# EAGLE board CT_schematic (EAGLE 7.6.0)

Size 100 x 80 mm. Coordinates in mm from the lower left corner, seen from the top.
Outline: 0,0 100,0 100,80 0,80 0,0
Copper layers (1*16): Top 0.035mm / dielectric 1.5mm / Bottom 0.035mm
Design rules "default": minimum track width 10mil, minimum drill 24mil, track to track 8mil, track to pad 8mil, pad to pad 8mil, via to via 8mil, smd to smd 8mil, copper to edge 40mil, drill to drill 8mil, minimum pad ring 10mil, minimum via ring 8mil, stop-mask expansion 4mil, vias tented up to drill 0mil, thermal gap 10mil

## Footprints (pad centres in the part's own frame; a part is rotated, then mirrored left to right if it is on the bottom)
C0603 = smd 0.8 x 0.8: 1 -0.762,0; 2 0.762,0
C0402 = smd 0.5 x 0.5: 1 -0.508,0; 2 0.508,0
C1210 = smd 1.2 x 2.5: 1 -1.524,0; 2 1.524,0
C0805 = smd 1.2 x 1.3: 1 -1.016,0; 2 1.016,0
C1206 = smd 1.3 x 1.6: 1 -1.524,0; 2 1.524,0
L0603 = smd 0.8 x 0.8: 1 -0.762,0; 2 0.762,0
DR1040 = smd 1.6 x 3.2: 1 -4.458,0; 2 4.458,0
R0603 = smd 0.8 x 0.8: 1 -0.762,0; 2 0.762,0
LQFP64 = smd 0.3 x 1.2: 1 -3.75,-5.75; 2 -3.25,-5.75; 3 -2.75,-5.75; 4 -2.25,-5.75; 5 -1.75,-5.75; 6 -1.25,-5.75; 7 -0.75,-5.75; 8 -0.25,-5.75; 9 0.25,-5.75; 10 0.75,-5.75; 11 1.25,-5.75; 12 1.75,-5.75; 13 2.25,-5.75; 14 2.75,-5.75; 15 3.25,-5.75; 16 3.75,-5.75; 33 3.75,5.75; 34 3.25,5.75; 35 2.75,5.75; 36 2.25,5.75; 37 1.75,5.75; 38 1.25,5.75; 39 0.75,5.75; 40 0.25,5.75; 41 -0.25,5.75; 42 -0.75,5.75; 43 -1.25,5.75; 44 -1.75,5.75; 45 -2.25,5.75; 46 -2.75,5.75; 47 -3.25,5.75; 48 -3.75,5.75 | smd 1.2 x 0.3: 17 5.75,-3.75; 18 5.75,-3.25; 19 5.75,-2.75; 20 5.75,-2.25; 21 5.75,-1.75; 22 5.75,-1.25; 23 5.75,-0.75; 24 5.75,-0.25; 25 5.75,0.25; 26 5.75,0.75; 27 5.75,1.25; 28 5.75,1.75; 29 5.75,2.25; 30 5.75,2.75; 31 5.75,3.25; 32 5.75,3.75; 49 -5.75,3.75; 50 -5.75,3.25; 51 -5.75,2.75; 52 -5.75,2.25; 53 -5.75,1.75; 54 -5.75,1.25; 55 -5.75,0.75; 56 -5.75,0.25; 57 -5.75,-0.25; 58 -5.75,-0.75; 59 -5.75,-1.25; 60 -5.75,-1.75; 61 -5.75,-2.25; 62 -5.75,-2.75; 63 -5.75,-3.25; 64 -5.75,-3.75
SOIC-8 = smd 1.6 x 0.6: 1 -2.7,1.905 | smd 1.55 x 0.6: 2 -2.7,0.635; 3 -2.7,-0.635; 4 -2.7,-1.905; 5 2.7,-1.905; 6 2.7,-0.635; 7 2.7,0.635; 8 2.7,1.905
TST-110-05-T-D-RA = drill 1 pad 1.7 square: 1 0,0 | drill 1 pad 1.7: 2 0,2.54; 3 2.54,0; 4 2.54,2.54; 5 5.08,0; 6 5.08,2.54; 7 7.62,0; 8 7.62,2.54; 9 10.16,0; 10 10.16,2.54; 11 12.7,0; 12 12.7,2.54; 13 15.24,0; 14 15.24,2.54; 15 17.78,0; 16 17.78,2.54; 17 20.32,0; 18 20.32,2.54; 19 22.86,0; 20 22.86,2.54
AT24C02D = smd 1.6 x 0.6: 1 -2.475,1.905 | smd 1.55 x 0.6: 2 -2.475,0.635; 3 -2.475,-0.635; 4 -2.475,-1.905; 5 2.475,-1.905; 6 2.475,-0.635; 7 2.475,0.635; 8 2.475,1.905
DFN-6 = smd 0.805 x 0.3: 1 -0.952,0.5; 2 -0.952,0; 3 -0.952,-0.5; 4 0.952,-0.5; 5 0.952,0; 6 0.952,0.5 | smd 0.61 x 1.42: 7 0,0
FCI_10118193-0001LF = smd 0.4 x 1.35: 1 -1.3,2.675; 2 -0.65,2.675; 3 0,2.675; 4 0.65,2.675; 5 1.3,2.675 | smd 1.6 x 1.4: 6 -3.2,2.45; 7 3.2,2.45 | smd 1.9 x 1.9: 8 -1.2,0; 9 1.2,0 | hole 0.5: -3.3,0; 3.3,0
SOT143B = smd 1 x 0.7: 1 -0.75,-1 | smd 0.6 x 0.7: 2 0.95,-1; 3 0.95,1; 4 -0.95,1
QFN-28 = smd 0.813 x 0.305: 1 -2.451,1.5; 2 -2.451,1; 3 -2.451,0.5; 4 -2.451,0; 5 -2.451,-0.5; 6 -2.451,-1; 7 -2.451,-1.5; 15 2.451,-1.5; 16 2.451,-1; 17 2.451,-0.5; 18 2.451,0; 19 2.451,0.5; 20 2.451,1; 21 2.451,1.5 | smd 0.305 x 0.813: 8 -1.5,-2.451; 9 -1,-2.451; 10 -0.5,-2.451; 11 0,-2.451; 12 0.5,-2.451; 13 1,-2.451; 14 1.5,-2.451; 22 1.5,2.451; 23 1,2.451; 24 0.5,2.451; 25 0,2.451; 26 -0.5,2.451; 27 -1,2.451; 28 -1.5,2.451 | smd 3.607 x 3.607: 29 0,0
SJ-43515TS-SMT-TR = smd 2.2 x 3: 1 0.6,-7.4; 4 3.4,-7.4 | smd 3 x 3: 2 12.8,-7.4; 5 17,-3 | smd 2 x 3: 3 5.3,0; 6 2.5,0 | drill 1.8: P$7 4.5,-3.69; P$8 11.54,-3.69
ABLS-25.000MHZ-B2F-T = smd 5.6 x 2.8: 1 -3.81,0; 2 5.69,0
ASEK = smd 1.4 x 1: 1 -1.1,-0.8; 2 1.1,-0.8; 3 1.1,0.8; 4 -1.1,0.8
ASFL1 = smd 1.7 x 1.5: 1 -1.27,-1.1; 2 1.27,-1.1; 3 1.27,1.1; 4 -1.27,1.1
TSOT-23-5 = smd 1.3 x 0.62: 1 -1.31,0.95; 2 -1.31,0; 3 -1.31,-0.95; 4 1.31,-0.95; 5 1.31,0.95
DFN8_2X3MC = smd 0.813 x 0.305: 1 -1.398,0.75; 2 -1.398,0.25; 3 -1.398,-0.25; 4 -1.398,-0.75; 5 1.398,-0.75; 6 1.398,-0.25; 7 1.398,0.25; 8 1.398,0.75 | smd 1.753 x 1.549: 9 0,0
JST-2-SMD = smd 1 x 4.6: 1 -1,-3.7; 2 1,-3.7 | smd 1.6 x 3.4: NC1 -3.4,1.5; NC2 3.4,1.5
SON-6 = smd 0.55 x 0.3: 1 -0.355,0.5 | smd 0.52 x 0.3: 2 -0.37,0; 3 -0.37,-0.5; 4 0.37,-0.5; 5 0.37,0; 6 0.37,0.5
SW_4-1437565-2 = smd 1.4 x 2.1: 1 -2.23,4.55; 2 -2.23,-4.55; 3 2.23,4.55; 4 2.23,-4.55
LGM67K-G1J2-24-Z = smd 0.8 x 1.4: A -2,0; C 0,0
NC7SZ125M5X = smd 1.3 x 0.7: 1 -1.3,0.95; 2 -1.3,0; 3 -1.3,-0.95; 4 1.3,-0.95; 5 1.3,0.95

## Placement (x,y rotation side)
C1  1e-06  [C0603]  -41.91,67.31 0 top  (outside the outline)
C2  1e-07  [C0603]  -45.72,67.31 0 top  (outside the outline)
C3  1e-07  [C0603]  -49.53,67.31 0 top  (outside the outline)
C4  1e-07  [C0603]  -53.34,67.31 0 top  (outside the outline)
C5  1e-07  [C0603]  -57.15,67.31 0 top  (outside the outline)
C6  1e-07  [C0603]  -60.96,67.31 0 top  (outside the outline)
C7  4.7e-06  [C0603]  -34.29,67.31 0 top  (outside the outline)
C8  2.2e-06  [C0603]  -38.1,67.31 0 top  (outside the outline)
C9  1e-08  [C0603]  -64.77,67.31 0 top  (outside the outline)
C10  1e-06  [C0603]  -68.58,67.31 0 top  (outside the outline)
C11  1e-11  [C0402]  -49.53,72.39 0 top  (outside the outline)
C12  1e-11  [C0402]  -53.34,72.39 0 top  (outside the outline)
C13  1e-06  [C0603]  -72.39,67.31 0 top  (outside the outline)
C14  1e-08  [C0402]  -57.15,72.39 0 top  (outside the outline)
C15  1e-07  [C0402]  -60.96,72.39 0 top  (outside the outline)
C16  1e-08  [C0402]  -64.77,72.39 0 top  (outside the outline)
C17  1e-07  [C0402]  -68.58,72.39 0 top  (outside the outline)
C18  2.2e-05  [C1210]  -58.42,49.53 0 top  (outside the outline)
C19  2.2e-05  [C1210]  -64.77,49.53 0 top  (outside the outline)
C20  1e-09  [C0402]  -72.39,72.39 0 top  (outside the outline)
C21  1e-09  [C0402]  -76.2,72.39 0 top  (outside the outline)
C22  1e-07  [C0402]  -15.24,77.47 0 top  (outside the outline)
C23  1e-07  [C0402]  -19.05,77.47 0 top  (outside the outline)
C24  1e-07  [C0402]  -22.86,77.47 0 top  (outside the outline)
C25  1e-07  [C0402]  -26.67,77.47 0 top  (outside the outline)
C26  1e-07  [C0402]  -30.48,77.47 0 top  (outside the outline)
C27  1e-05  [C0805]  -27.94,55.88 0 top  (outside the outline)
C28  1e-05  [C0805]  -33.02,55.88 0 top  (outside the outline)
C29  1e-05  [C0805]  -38.1,55.88 0 top  (outside the outline)
C30  1e-05  [C0805]  -43.18,55.88 0 top  (outside the outline)
C31  1e-05  [C0805]  -48.26,55.88 0 top  (outside the outline)
C32  1e-08  [C0402]  -34.29,77.47 0 top  (outside the outline)
C33  1e-08  [C0402]  -38.1,77.47 0 top  (outside the outline)
C34  1e-05  [C0805]  -53.34,55.88 0 top  (outside the outline)
C35  1e-05  [C0805]  -58.42,55.88 0 top  (outside the outline)
C36  1e-07  [C0402]  -41.91,77.47 0 top  (outside the outline)
C37  1e-05  [C1206]  -71.12,48.26 0 top  (outside the outline)
C38  1e-05  [C1206]  -77.47,48.26 0 top  (outside the outline)
C39  1e-08  [C0402]  -45.72,77.47 0 top  (outside the outline)
C40  1e-08  [C0402]  -49.53,77.47 0 top  (outside the outline)
F1  240.0  [L0603]  -76.2,67.31 0 top  (outside the outline)
I1  5.2e-06  [DR1040]  -55.88,20.32 0 top  (outside the outline)
R2  1000.0  [R0603]  -15.24,72.39 0 top  (outside the outline)
R4  4700.0  [R0603]  -19.05,72.39 0 top  (outside the outline)
R5  2200.0  [R0603]  -22.86,72.39 0 top  (outside the outline)
R6  2200.0  [R0603]  -26.67,72.39 0 top  (outside the outline)
R7  2200.0  [R0603]  -30.48,72.39 0 top  (outside the outline)
R8  2200.0  [R0603]  -34.29,72.39 0 top  (outside the outline)
R9  10000.0  [R0603]  -25.4,62.23 0 top  (outside the outline)
R10  10000.0  [R0603]  -30.48,62.23 0 top  (outside the outline)
R11  10000.0  [R0603]  -35.56,62.23 0 top  (outside the outline)
R12  10000.0  [R0603]  -40.64,62.23 0 top  (outside the outline)
R13  10000.0  [R0603]  -45.72,62.23 0 top  (outside the outline)
R14  10000.0  [R0603]  -50.8,62.23 0 top  (outside the outline)
R15  10000.0  [R0603]  -55.88,62.23 0 top  (outside the outline)
R16  10000.0  [R0603]  -60.96,62.23 0 top  (outside the outline)
R17  10000.0  [R0603]  -66.04,62.23 0 top  (outside the outline)
R18  47000.0  [R0603]  -71.12,62.23 0 top  (outside the outline)
R19  47000.0  [R0603]  -76.2,62.23 0 top  (outside the outline)
R20  47000.0  [R0603]  -15.24,67.31 0 top  (outside the outline)
R21  680.0  [R0603]  -38.1,72.39 0 top  (outside the outline)
R22  220000.0  [R0603]  -76.2,55.88 0 top  (outside the outline)
R23  1000000.0  [R0603]  -71.12,55.88 0 top  (outside the outline)
R24  10000.0  [R0603]  -20.32,67.31 0 top  (outside the outline)
R25  10000.0  [R0603]  -25.4,67.31 0 top  (outside the outline)
R26  9100.0  [R0603]  -41.91,72.39 0 top  (outside the outline)
R27  680000.0  [R0603]  -15.24,62.23 0 top  (outside the outline)
R28  120000.0  [R0603]  -20.32,62.23 0 top  (outside the outline)
R29  2000.0  [R0603]  -45.72,72.39 0 top  (outside the outline)
R30  10000.0  [R0603]  -30.48,67.31 0 top  (outside the outline)
U1  STM32F412RET6  [LQFP64]  -24.13,21.59 0 top  (outside the outline)
U2  AT25M01-SSHM-T  [SOIC-8]  -41.91,33.02 0 top  (outside the outline)
U3  TST-110-05-T-D-RA  [TST-110-05-T-D-RA]  -46.99,39.37 0 top  (outside the outline)
U4  AT24C02D-SSHM-T  [AT24C02D]  -25.4,33.02 0 top  (outside the outline)
U5  SI7006-A20-IM  [DFN-6]  -66.04,76.2 0 top  (outside the outline)
U6  10118193-0001LF  [FCI_10118193-0001LF]  -72.39,31.75 0 top  (outside the outline)
U7  prtr5v0u2ax  [SOT143B]  -62.23,77.47 0 top  (outside the outline)
U8  WM8731CLSEFL  [QFN-28]  -50.8,49.53 0 top  (outside the outline)
U9  SJ-43515TS-SMT-TR  [SJ-43515TS-SMT-TR]  -39.37,10.16 0 top  (outside the outline)
U10  SJ-43515TS-SMT-TR  [SJ-43515TS-SMT-TR]  -67.31,10.16 0 top  (outside the outline)
U11  ABLS-25.000MHZ-B2F-T  [ABLS-25.000MHZ-B2F-T]  -26.67,49.53 0 top  (outside the outline)
U12  ASEK-32.768KHz-ECST  [ASEK]  -66.04,41.91 0 top  (outside the outline)
U13  ASFL1-12.288MHZ-EC-T  [ASFL1]  -63.5,33.02 0 top  (outside the outline)
U14  ltc3406es5  [TSOT-23-5]  -63.5,55.88 0 top  (outside the outline)
U15  MCP73831T-2ACI/MC  [DFN8_2X3MC]  -74.93,76.2 0 top  (outside the outline)
U16  S2B-PH-SM4-TB(LF)(SN)  [JST-2-SMD]  -71.12,21.59 0 top  (outside the outline)
U17  TPS3895ADRYR  [SON-6]  -68.58,76.2 0 top  (outside the outline)
U18  4-1437565-2  [SW_4-1437565-2]  -45.72,21.59 0 top  (outside the outline)
U19  Q65110A2395  [LGM67K-G1J2-24-Z]  -38.1,49.53 0 top  (outside the outline)
U20  nc7sz125m5x  [NC7SZ125M5X]  -15.24,55.88 0 top  (outside the outline)
U21  nc7sz125m5x  [NC7SZ125M5X]  -21.59,55.88 0 top  (outside the outline)

## Library data of the parts
C1-C40 F1 I1 R2 R4-R30 U1-U21 = circuit_tree

## Nets
CLK_CRYSTAL_U1_5: C11.1 U1.5 U11.1
CLK_CRYSTAL_U1_6: C12.1 U1.6 U11.2
CLK_U1_3: U1.3 U12.3
CLK_U8_1: U8.1 U13.3
GND: C1.2 C2.2 C3.2 C4.2 C5.2 C6.2 C7.2 C8.2 C9.2 C10.2 C11.2 C12.2 C13.2 C14.2 C15.2 C16.2 C17.2 C21.2 C22.2 C23.2 C24.2 C25.2 C26.2 C27.2 C28.2 C29.2 C30.2 C31.2 C32.2 C33.2 C34.2 C35.1 C35.2 C36.2 C37.2 C38.2 C39.2 C40.2 R2.2 R9.2 R14.2 R16.2 R17.2 R18.2 R19.2 R20.2 R22.2 R26.2 R28.2 R29.2 U1.12 U1.18 U1.31 U1.44 U1.47 U1.63 U2.4 U3.4 U3.6 U3.8 U3.10 U3.12 U3.14 U3.16 U3.18 U3.20 U4.4 U5.2 U5.7 U6.5 U6.6 U6.7 U6.8 U6.9 U7.1 U8.4 U8.15 U8.19 U8.25 U8.26 U8.29 U9.1 U10.1 U12.2 U13.2 U14.2 U15.6 U15.9 U16.2 U17.2 U19.C U20.2 U20.3 U21.1 U21.3
INPUT_USBPOWER_5V: C13.1 C37.1 R30.2 U1.42 U6.1 U7.4 U15.1 U15.2
NET_U1_7: R4.1 U1.7 U21.4
NET_U1_13: C9.1 C10.1 F1.1 U1.13
NET_U1_29: R7.1 U1.29 U4.6
NET_U1_30: C8.1 U1.30
NET_U1_57: U19.A
NET_U1_58: R5.1 U1.58 U5.6
NET_U1_59: R6.1 U1.59 U5.1
NET_U1_60: R9.1 U1.60
NET_U1_61: U18.3 U18.4
NET_U1_62: R8.1 U1.62 U4.5
NET_U2_3: R10.1 U2.3
NET_U2_7: R12.1 U2.7
NET_U4_1: R15.1 U4.1
NET_U4_2: R16.1 U4.2
NET_U4_3: R17.1 U4.3
NET_U4_7: R14.1 U4.7
NET_U8_9: U8.9
NET_U8_20: C26.1 C31.1 U8.20
NET_U9_2: C19.1 R19.1 U9.2
NET_U9_5: C18.1 R18.1 U9.5
NET_U9_13: C18.2
NET_U9_14: C19.2
NET_U10_5: C20.1 C21.1 R20.1 R21.1 U10.5
NET_U10_21: R21.2
NET_U10_22: C20.2
NET_U14_1: U14.1
NET_U14_3: I1.1 U14.3
NET_U14_5: R22.1 R23.1 U14.5
NET_U14_ATNET_3: I1.2 R23.2
NET_U15_5: R30.1 U15.5
NET_U15_8: R29.1 U15.8
NET_U17_1: R25.1 R26.1 U17.1
NET_U17_3: R27.2 R28.1 U17.3
NET_U17_4: R24.1 U17.4 U20.4 U21.2
NET_U18_1: R2.1 U18.1 U18.2
PROC_I2S2_CK: U1.34 U8.7
PROC_I2S2_EXT_SD: U1.10 U8.10
PROC_I2S2_SD: U1.11 U8.8
PROC_I2S2_WS: U1.33 U8.9 U8.11
PROC_SPI1_MISO: U1.22 U2.2
PROC_SPI1_MOSI: U1.23 U2.5
PROC_SPI1_NSS: R11.1 U1.20 U2.1
PROC_SPI1_SCK: U1.21 U2.6
PROC_SYS_JTCK_SWCLK: U1.49 U3.9
PROC_SYS_JTDO_SWO: U1.55 U3.13
PROC_SYS_JTMS_SWDIO: U1.46 U3.7
PROC_USB_OTG_FS_DM: U1.44 U6.2 U7.3
PROC_USB_OTG_FS_DP: U1.45 U6.3 U7.2
RST_OUT_U3_SRESET_B: R13.1 U3.15 U20.1
VCC_S1_3V7: C34.1 C38.1 U14.4 U15.3 U15.4 U16.1
VCC_TIER1_3V3: C1.1 C2.1 C3.1 C4.1 C5.1 C6.1 C7.1 C14.1 C15.1 C16.1 C17.1 C22.1 C23.1 C24.1 C25.1 C27.1 C28.1 C29.1 C30.1 C32.1 C33.1 C35.2 C36.1 C39.1 C40.1 F1.2 I1.2 R4.2 R5.2 R6.2 R7.2 R8.2 R10.2 R11.2 R12.2 R13.2 R15.2 R23.2 R24.2 R25.2 R27.1 U1.1 U1.19 U1.32 U1.48 U1.64 U2.8 U3.1 U4.8 U5.5 U8.3 U8.5 U8.12 U8.18 U12.4 U13.4 U17.6 U20.5 U21.5

## Tracks (layer width: path | path; a pad name or v marks a point on that pad's centre or on a via)
CLK_CRYSTAL_U1_5  (2 unrouted)
CLK_CRYSTAL_U1_6  (2 unrouted)
CLK_U1_3  (1 unrouted)
CLK_U8_1  (1 unrouted)
GND  (94 unrouted)
INPUT_USBPOWER_5V  (7 unrouted)
NET_U1_7  (2 unrouted)
NET_U1_13  (3 unrouted)
NET_U1_29  (2 unrouted)
NET_U1_30  (1 unrouted)
NET_U1_58  (2 unrouted)
NET_U1_59  (2 unrouted)
NET_U1_60  (1 unrouted)
NET_U1_61  (1 unrouted)
NET_U1_62  (2 unrouted)
NET_U2_3  (1 unrouted)
NET_U2_7  (1 unrouted)
NET_U4_1  (1 unrouted)
NET_U4_2  (1 unrouted)
NET_U4_3  (1 unrouted)
NET_U4_7  (1 unrouted)
NET_U8_20  (2 unrouted)
NET_U9_2  (2 unrouted)
NET_U9_5  (2 unrouted)
NET_U10_5  (4 unrouted)
NET_U14_3  (1 unrouted)
NET_U14_5  (2 unrouted)
NET_U14_ATNET_3  (1 unrouted)
NET_U15_5  (1 unrouted)
NET_U15_8  (1 unrouted)
NET_U17_1  (2 unrouted)
NET_U17_3  (2 unrouted)
NET_U17_4  (3 unrouted)
NET_U18_1  (2 unrouted)
PROC_I2S2_CK  (1 unrouted)
PROC_I2S2_EXT_SD  (1 unrouted)
PROC_I2S2_SD  (1 unrouted)
PROC_I2S2_WS  (2 unrouted)
PROC_SPI1_MISO  (1 unrouted)
PROC_SPI1_MOSI  (1 unrouted)
PROC_SPI1_NSS  (2 unrouted)
PROC_SPI1_SCK  (1 unrouted)
PROC_SYS_JTCK_SWCLK  (1 unrouted)
PROC_SYS_JTDO_SWO  (1 unrouted)
PROC_SYS_JTMS_SWDIO  (1 unrouted)
PROC_USB_OTG_FS_DM  (2 unrouted)
PROC_USB_OTG_FS_DP  (2 unrouted)
RST_OUT_U3_SRESET_B  (2 unrouted)
VCC_S1_3V7  (5 unrouted)
VCC_TIER1_3V3  (58 unrouted)